# Allegro board sensor.brd
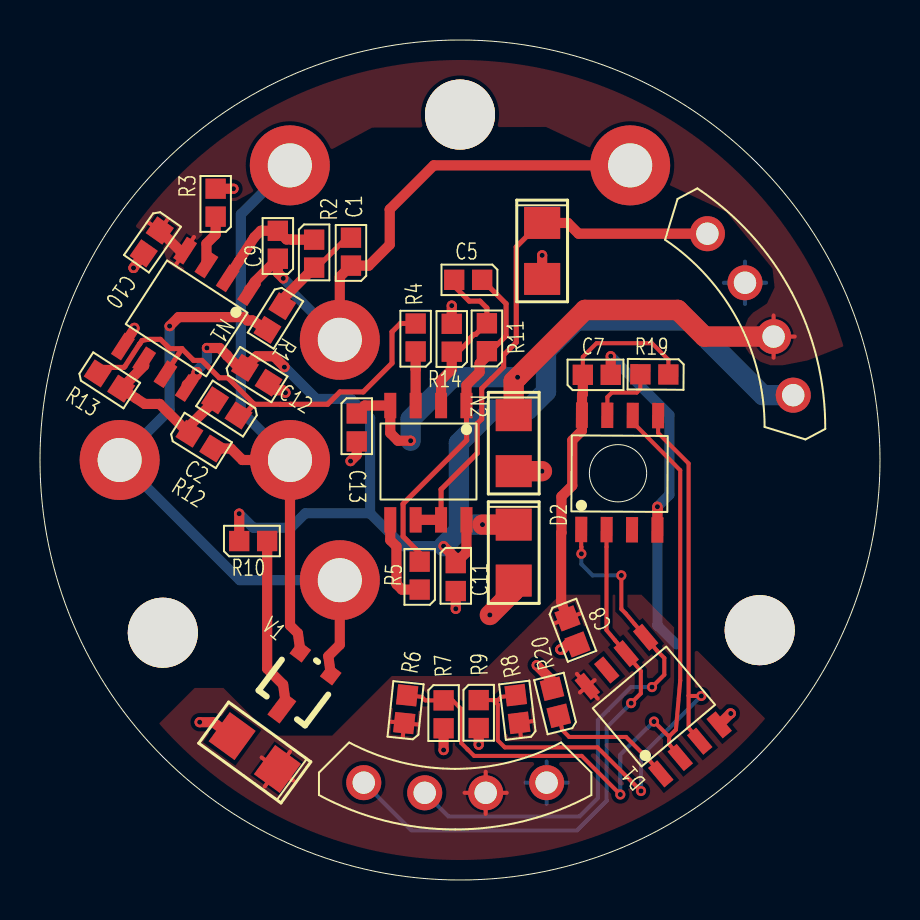
[diagram p0: board, top side]
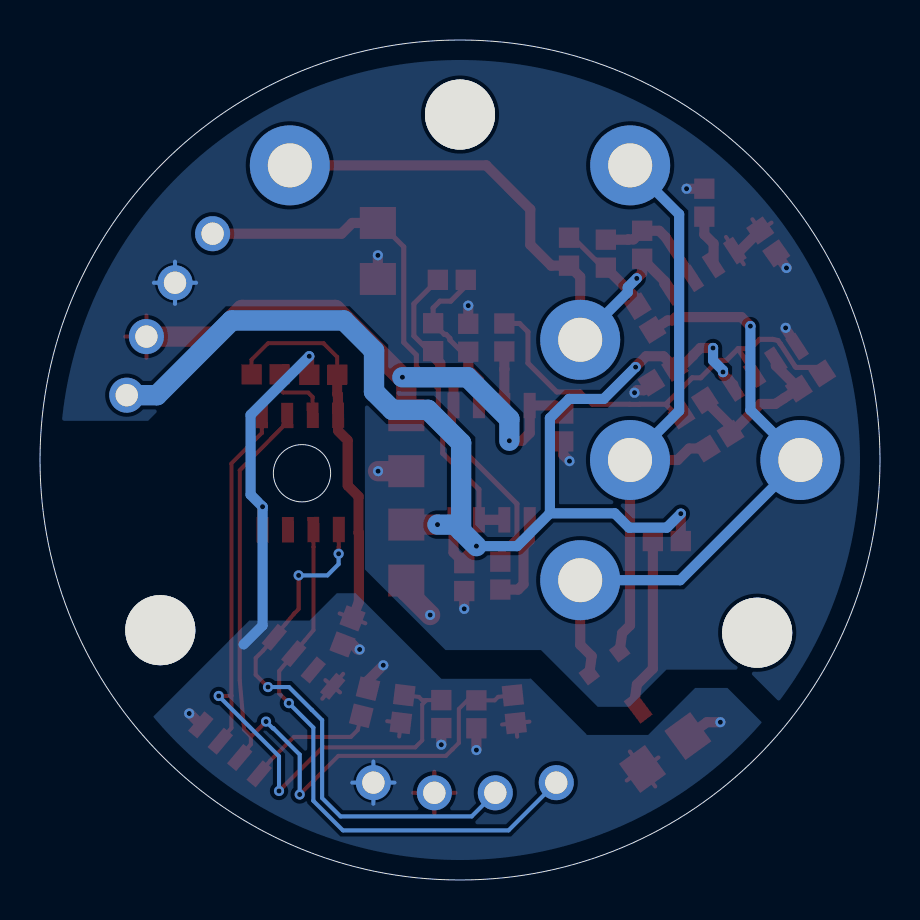
[diagram p1: board, bottom side, seen from below]

Outline 42 x 42 mm; copper layers: TOP, BOTTOM. Coordinates in mm from the lower left corner of the outline.
Outline path: circle c21,21 r21 ; circle c28.9,20.34 r1.43

## Placement (name value [footprint] x y rotation side)
C1  1nF  [0603]  15.55 30.72 90 top
C2  0.33uF  [0603]  9.93 23.23 147 top
C3  10uF/25V  [C1206]  23.69 16.37 270 top
C4  10uF/25V  [C1206]  23.69 21.84 270 top
C5  0.1uF  [0603]  22.11 30.01 180 top
C6  10uF  [C1206]  10.74 6.37 144 top
C7  0.1uF  [0603]  27.14 25.26 0 top
C8  0.1uF  [0603]  26.37 13.08 291 top
C9  10nF  [0603]  11.89 31.06 90 top
C10  0.1uF  [0603]  5.99 32.48 235 top
C11  0.1uF  [0603]  20.79 15.84 270 top
C12  0.1uF  [0603]  10.25 25.61 328 top
C13  0.1uF  [0603]  15.84 23.32 270 top
C16  10uF  [C1206]  25.11 31.45 270 top
D1  AT24C02  [SO8]  31.04 5.31 130 top
D2  TMP275  [SO8]  27.06 17.53 89.7 top
N1  OPA2277  [SO8]  10.45 29.39 237 top
N2  OPA2277  [SO8]  21.32 23.72 270 top
NOREF  -  [unnamed]  35.99 12.49 0 top
NOREF#2  -  [unnamed]  6.14 12.36 0 top
NOREF#3  -  [unnamed]  21 38.27 0 top
R1  10k  [0603]  12.11 28.69 238 top
R2  10k  [0603]  13.71 32.01 270 top
R3  10k  [0603]  8.78 33.17 90 top
R4  10k  [0603]  18.78 26.43 90 top
R5  10k  [0603]  18.98 14.52 90 top
R6  10k  [0603]  18.21 7.85 84 top
R7  10k  [0603]  20.18 8.98 270 top
R8  10k  [0603]  23.96 7.86 97 top
R9  10k  [0603]  21.94 9 270 top
R10  1M  [0603]  9.96 16.95 0 top
R11  47k  [0603]  22.34 26.44 90 top
R12  10R  [0603]  7.47 22.31 328 top
R13  1k  [0603]  2.89 25.33 327 top
R14  4.7k  [0603]  20.59 26.41 90 top
R19  10k  [0603]  31.42 25.28 179.6 top
R20  10k  [0603]  25.94 8.21 104 top
TP2  7EF  [SO2_4S]  14.99 27.01 0 top
TP3  4S  [SO2_4S]  29.51 35.73 0 top
TP5  7EF  [SO2_4S]  14.99 14.99 0 top
TP6  4S  [SO2_4S]  3.98 21 0 top
TP8  7EF  [SO2_4S]  12.5 21 0 top
TP9  4S  [SO2_4S]  12.49 35.73 0 top
V1  SST117  [SOT23]  14.54 10.27 143 top
X1  HEADER 4  [SIP4_CIR]  16.19 4.87 0 top
X2  HEADER 4  [SIP4_CIR]  37.66 24.24 118 top

## Library data of the parts
C1 C7-C13 = 0.01uFCapacitor16V10%0402
C2-C6 C16 = CT2012_0
D1 = AT24C04_1
D2 = AT24C04_2
N1 N2 = AD8072
R1-R14 R19 R20 = R1005_0
TP2 TP3 TP5 TP6 TP8 TP9 = TEST POINT_0
V1 = 2N4851_2
X1 X2 = HEADER 4

## Footprints (pads in the part's own frame, mm; a bottom-side part is the same pattern mirrored in y, then rotated)
0603
  rect 1.016x1.016 smd: 1(0,0) 2(1.397,0)
C1206
  rect 1.6x1.803 smd: 1(-1.4,0) 2(1.4,0)
SIP4_CIR
  round 1.753 hole 1.118: 1(0,0) 2(3.048,-0.508) 3(6.096,-0.508) 4(9.144,0)
SO2_4S
  round 4 hole 2.2: 1(0,0)
SO8
  rect 1.27x0.6 smd: 1(0,0) 2(0,-1.27) 3(0,-2.54) 4(0,-3.81) 5(5.715,-3.81) 6(5.715,-2.54) 7(5.715,-1.27) 8(5.715,0)
SOT23
  rect 0.762x0.787 smd: 1(0,0) 2(1.905,0)
  rect 0.762x1.397 smd: 3(0.95,2.799)
unnamed
  round 3.5 hole 3.5: (0,0)

## Nets
+3.3VD: C6.1 C7.1 C8.1 D1.8(VCC) D2.8(VCC) R6.1 R8.1 R19.1 X1.3
+12V: C3.1 C11.1 C12.1 N1.8(V+) N2.8(V+) R10.1 X2.1
-12V: C4.1 C10.1 C13.1 N1.4(V-) N2.4(V-) X2.2
AGND: C3.2 C4.2 C10.2 C11.2 C12.2 C13.2 C16.2 N1.5(IN+) R3.2 R14.2 X2.3
DGND: C6.2 C7.2 C8.2 D1.4(GND) D2.4(GND) R7.2 R9.2 R20.2 X1.4
A1: D1.2(A1) D2.6(A1) R6.2 R7.1
A2: D1.3(A2) D2.5(A2) R8.2 R9.1
CE: C1.1 C9.1 N1.1(OUT) TP2.1 TP3.1
IN+: N1.3(IN+) R3.1
IN-: C9.2 N1.2(IN-) R2.1
RE: R1.2 TP5.1 TP6.1 V1.1(D)
SCL: D1.6(SCL) D2.2(SCL) X1.1
SDA: D1.5(SDA) D2.1(SDA) X1.2
SO2: C16.1 N2.6(IN-) N2.7(OUT) X2.4
WE: R12.2 TP8.1 TP9.1 V1.2(S)
N16750688: C2.2 N1.6(IN-) R12.1 R13.2
N16750692: N2.3(IN+) R4.1
N16750696: N2.5(IN+) R5.1
N16750700: C5.1 N2.1(OUT) R5.2 R11.1
N16750707: C2.1 N1.7(OUT) R4.2 R13.1
N16750928: C5.2 N2.2(IN-) R11.2 R14.1
N16752562: C1.2 R1.1 R2.2
N16752936: R10.2 V1.3(G)
N16754242: D2.7(A0) R19.2
N16756486: D1.1(A0) R20.1

Pads without a net: D1 7; D2 3

## Via types
v1: diameter 0.508, hole 0.254, TOP to BOTTOM, 36 vias

## Routing (per net, layer and track width the routed paths; a pad name or vN(x,y) marks a point on that pad's centre or on a via; arc(x,y) is an arc through that point)
+3.3VD: length 35.6
  TOP w0.203: C8.1 27.01,13.33 ; C8.1 26.13,13.72 ; C8.1 25.73,12.84 ; R6.1 18.89,7.77 ; R6.1 17.53,7.92 ; R6.1 18.14,7.16 ; 27,9.38 D1.8 ; D1.8 26.84,10.31 ; D1.8 27.73,9.99 ; D1.8 27.89,9.06 ; 21.23,4.36 X1.3 ; X1.3 23.34,4.36 ; X1.3 22.28,3.31 ; X1.3 22.28,5.41 ; C7.1 27.14,26.15 27.83,26.84 30.6,26.84 31.42,26.01 R19.1 ; C6.1 12.51,6.42 ; C6.1 11.08,6.13 ; C6.1 12.66,4.98 ; C6.1 11.24,4.68 ; 24.04,7.18 R8.1 24.64,7.94
  TOP w0.508: C7.1 27.14,24.3 27.1,24.26 D2.8 27.1,22.46 26.61,21.98 26.61,19.72 26.07,19.18 26.07,17.37 26.06,17.35 26.06,13.91 C8.1
+12V: length 64
  TOP w0.508: v1(8.35,26.6) 8.98,26.6 9.35,26.24 9.35,26.22 9.96,25.61 C12.1 10.83,26.19 11.7,26.19 12.22,25.66 v1(12.22,25.64) ; v1(7.85,25.4) 7.83,25.37 7.83,25.25 7.34,24.76 N1.8 ; v1(20.18,16.69) 20.79,16.08 C11.1 21.32,16.38 N2.8 ; R10.1 v1(9.96,18.32)
  TOP w1.016: C3.1 v1(22.13,17.77)
  BOTTOM w0.508: v1(12.22,25.64) 13.81,24.05 15.55,24.05 16.5,23.1 16.5,18.33 ; 16.5,18.33 18.14,16.69 v1(20.18,16.69) ; 16.5,18.33 13.26,18.33 12.54,17.61 10.66,17.61 v1(9.96,18.32) ; v1(8.35,26.6) 8.35,25.98 7.85,25.48 v1(7.85,25.4)
  BOTTOM w1.016: 20.94,17.46 v1(20.18,16.69) ; 20.94,17.46 21.25,17.77 v1(22.13,17.77) ; 20.94,17.46 20.94,21.85 22.6,23.51 24.39,23.51 25.3,24.42 25.3,26.47 26.81,27.97 32.42,27.97 36.15,24.24 X2.1
-12V: length 37.4
  TOP w0.203: 6.81,30.79 N1.4 ; N1.4 6.85,31.73 ; N1.4 7.7,32.15 ; 36.68,26.12 X2.2 ; X2.2 37.73,27.17 ; X2.2 36.68,28.22 ; C10.1 6.38,33.04 ; C10.1 6.55,32.08 ; C10.1 5.43,32.87
  TOP w0.508: v1(18.53,21.96) 17.9,21.96 17.51,22.35 N2.4 16.24,23.72 C13.1 ; N1.4 6.99,31.47 C10.1
  TOP w1.016: C4.1 23.69,24.94 v1(23.88,25.14) 27.25,28.5 31.89,28.5 33.22,27.17 X2.2
  BOTTOM w1.016: v1(23.88,25.14) 20.62,25.14 18.53,23.05 v1(18.53,21.96)
AGND: length 15.9
  TOP w0.508: C13.2 15.84,21.26 v1(15.53,20.95) ; C12.2 11.81,24.49 12.15,24.49 v1(12.27,24.37) ; C16.2 v1(25.11,31.23) ; N1.5 4.72,27.56 v1(4.72,27.61) ; C11.2 v1(20.79,13.56) ; R3.2 v1(9.67,34.56) ; C10.2 v1(4.68,30.6) ; R14.2 v1(20.59,28.72)
  TOP w1.016: C3.2 23.69,14.44 v1(22.49,13.25) ; C4.2 v1(25.1,20.44)
  BOTTOM w0.203: X2.3 36.3,29.86 ; X2.3 35.25,30.92 ; X2.3 34.2,29.86 ; X2.3 35.25,28.81
DGND: length 29.6
  TOP w0.508: R20.2 25.6,9.97 v1(24.84,10.74) ; v1(30.87,18.66) 30.87,18.53 30.88,18.52 D2.4 ; v1(26.02,11.53) 26.02,11.53 26.12,11.53 26.37,11.78 C8.2 ; R7.2 v1(20.18,6.5) ; R9.2 v1(21.94,6.76) ; C7.2 v1(28.54,26.19) ; v1(7.98,7.89) 8.65,7.89 C6.2 ; v1(34.54,8.33) 34.52,8.33 33.96,7.76 D1.4
  BOTTOM w0.203: X1.4 25.33,5.92 ; X1.4 24.28,4.87 ; X1.4 25.33,3.81 ; X1.4 26.39,4.87
  BOTTOM w0.508: 31.82,11.78 30.87,12.73 v1(30.87,18.66) 31.47,19.26 31.47,23.26 v1(28.54,26.19)
A1: length 37.5
  TOP w0.203: v1(30.7,7.92) 31.46,7.16 ; 31.46,7.16 31.46,7.18 31.8,7.52 32.01,9.98 32.01,20.48 29.63,22.89 D2.6 ; 31.46,7.16 31.46,6.79 D1.2 ; v1(29.02,4.28) 27.08,6.21 21.7,6.21 21.38,6.53 21.06,6.85 21.06,8.55 20.63,8.98 R7.1 19.27,8.98 19.09,9.16 R6.2
  BOTTOM w0.203: v1(30.7,7.92) 30.36,7.58 30.32,7.58 29.02,6.27 v1(29.02,4.28)
A2: length 36
  TOP w0.203: 22.67,9 22.89,8.78 22.89,6.98 23.24,6.63 27.87,6.63 v1(30.05,4.45) ; 22.67,9 22.9,9 23.06,9.15 R8.2 ; 22.67,9 R9.1 ; v1(33.07,9.2) 32.45,9.2 32.43,9.22 ; D1.3 32.43,7.6 32.43,9.22 ; D2.5 30.91,22.35 32.43,20.83 32.43,9.22
  BOTTOM w0.203: v1(33.07,9.2) 30.05,6.19 v1(30.05,4.45)
CE: length 28.6
  TOP w0.508: TP3.1 19.69,35.73 17.49,33.53 17.49,31.77 16.44,30.72 C1.1 14.99,30.16 TP2.1 ; v1(12.16,30.08) 11.89,30.35 C9.1 10.77,29.95 10.77,29.84 10.45,29.52 N1.1
  BOTTOM w0.508: v1(12.16,30.08) 12.61,29.63 12.61,29.39 TP2.1
IN+: length 2.6
  TOP w0.508: R3.1 8.78,32.28 8.32,31.82 N1.3
IN-: length 5.8
  TOP w0.508: R2.1 12.6,32.01 12.59,32.03 12.32,32.03 C9.2 11.04,32.46 10.72,32.14 N1.2
RE: length 31.5
  TOP w0.508: TP5.1 14.99,11.76 14.42,11.19 14.54,10.28 V1.1 ; R1.2 10.62,27.98 10.37,27.98 10.2,28.14 6.93,28.14 v1(6.48,27.7)
  BOTTOM w0.508: v1(6.48,27.7) 6.48,23.5 TP6.1 9.99,14.99 TP5.1
SCL: length 28.6
  TOP w0.203: v1(29.56,8.84) 30.04,9.33 30.04,10.45 D1.6 28.76,11.98 28.33,12.49 28.33,16.66 D2.2
  BOTTOM w0.203: v1(29.56,8.84) 28.33,7.62 28.33,3.96 26.85,2.48 18.57,2.48 X1.1
SDA: length 27.4
  TOP w0.203: v1(27.07,16.31) 27.07,16.65 27.06,16.66 D2.1 ; v1(30.6,9.65) 31.22,10.26 31.22,11.1 30.84,11.47 D1.5 29.28,13.33 29.07,13.54 v1(29.07,15.23)
  BOTTOM w0.203: X1.2 20.42,3.18 26.98,3.18 27.89,4.1 27.89,7.99 28.41,8.51 29.55,9.65 v1(30.6,9.65) ; v1(29.07,15.23) 27.63,15.23 27.07,15.79 v1(27.07,16.31)
SO2: length 26.8
  TOP w0.254: N2.7 20.05,19.53 21.86,21.34 21.86,22.83 22.09,23.05 22.09,24.57 22.56,25.05 22.57,25.05 23.18,25.67 23.18,26.25 23.81,26.88 23.81,31.66 25.01,32.85 C16.1
  TOP w0.508: C16.1 26.39,32.85 26.93,32.31 X2.4 ; N2.7 N2.6
WE: length 30.6
  TOP w0.508: V1.2 13.02,11.43 12.89,12.34 12.5,12.73 TP8.1 10.12,21 9.55,21.57 R12.2
  BOTTOM w0.508: TP9.1 10.04,33.28 10.04,23.46 TP8.1
N16750688: length 8.4
  TOP w0.508: N1.6 5.21,25.72 R13.2 5.24,23.8 5.98,23.8 R12.1 7.47,22.7 C2.2
N16750692: length 2.7
  TOP w0.508: R4.1 18.78,25.54 18.78,25.54 N2.3
N16750696: length 4.6
  TOP w0.508: R5.1 18.09,14.52 17.82,14.79 17.82,16.68 17.51,16.99 N2.5
N16750700: length 17.2
  TOP w0.254: R5.2 18.98,16.35 18.78,16.55 18.15,17.18 18.15,18.81 21.33,21.99 21.33,22.82 21.32,22.83 N2.1 ; C5.1 23.31,28.81 23.31,27.21 22.54,26.44 R11.1
  TOP w0.508: N2.1 21.32,24.74 21.98,25.4 21.98,25.83 22.33,26.17 22.33,26.43 R11.1
N16750707: length 23.2
  TOP w0.254: 7.09,26.57 7.68,25.98 8.09,25.98 8.96,25.11 9.39,25.11 10.71,23.79 ; 7.09,26.57 6.49,26.57 6.02,27.03 5.37,27.03 5.1,26.97 4.99,26.8 4.97,26.8 4.25,25.69 4.19,25.63 3.19,25.63 R13.1 ; 7.09,26.57 7.09,26.55 N1.7 ; 10.71,23.79 12.03,23.79 12.03,23.78 12.51,23.78 12.52,23.79 14.38,23.79 15,24.4 16.16,24.4 17.6,25.84 17.6,27.41 18.02,27.83 R4.2 ; 10.71,23.79 10.15,23.23 C2.1
N16750928: length 8.5
  TOP w0.254: R14.1 20.92,26.41 21.51,27 21.51,27.09 21.7,27.28 21.79,27.28 R11.2 22.34,28.6 22,28.94 21.46,28.94 20.71,29.7 C5.2
  TOP w0.508: N2.2 20.05,24.99 20.59,25.53 R14.1
N16752562: length 5
  TOP w0.254: R2.2 13.85,30.62 15.34,32.11 C1.2
  TOP w0.508: R1.1 12.11,29.02 R2.2
N16752936: length 8.7
  TOP w0.508: V1.3 12.28,8.86 12.16,9.77 11.36,10.57 R10.2
N16754242: length 3.5
  TOP w0.203: D2.7 28.37,23.24 28.37,24.15 28.59,24.37 29.84,24.37 30.02,24.55 R19.2
N16756486: length 6.6
  TOP w0.203: R20.1 26.12,7.5 26.46,7.15 29.3,7.15 30.48,5.97 D1.1

## Copper pours and planes (outline as drawn; the poured copper is in the pictures)
+3.3VD on TOP: 36.26,8.07 21.17,1 5.95,7.82 7.74,9.6 9.17,9.6 11.56,7.22 14.61,7.22 17.58,10.2 21.93,10.2 26,14.27 30.07,14.27
-12V on TOP: 36.03,25.91 35.47,26.31 35.3,26.57 35.21,26.86 35.19,27.1 35.19,27.54 35.4,28.08 35.64,28.36 36.34,28.82 36.73,29.63 36.62,30.57 34.31,33.41 25.3,37.65 16.6,37.62 9.8,33.95 8.1,33.95 8.12,31.99 7.1,30.38 6.37,30.87 6.1,31.76 4.76,32.67 24.33,40.72 40.17,26.69 38.38,25.98 37.12,25.73 36.54,25.73
AGND on BOTTOM: 12.54,8.66 10.68,10.52 6.65,10.52 5.06,8.92 13.71,39.62 40.9,22.96 36.59,22.96 32.03,27.52 27.05,27.52 25.75,26.22 25.75,15.53 21.72,11.5 16.95,11.5 14.11,8.66
DGND on BOTTOM: 36.34,8.17 21.19,1 5.9,7.88 7.63,9.6 9.24,9.6 11.59,7.25 14.67,7.25 14.67,7.29 17.48,10.09 17.52,10.06 21.93,10.06 26.21,14.34 27.16,14.34 28.52,12.97 31.54,12.97

## Text on the board
NCLEGEND-1-2: FIGURE | SIZE | 10.0 | 44.0 | 86.614 | 137.795 | DRILL CHART: TOP to BOTTOM | ALL UNITS ARE IN MILS | PLATED | QTY | 36 | 8 | 6 | 3
